# EAGLE board LPC1114FN28_mbed_Board (EAGLE 5.11)
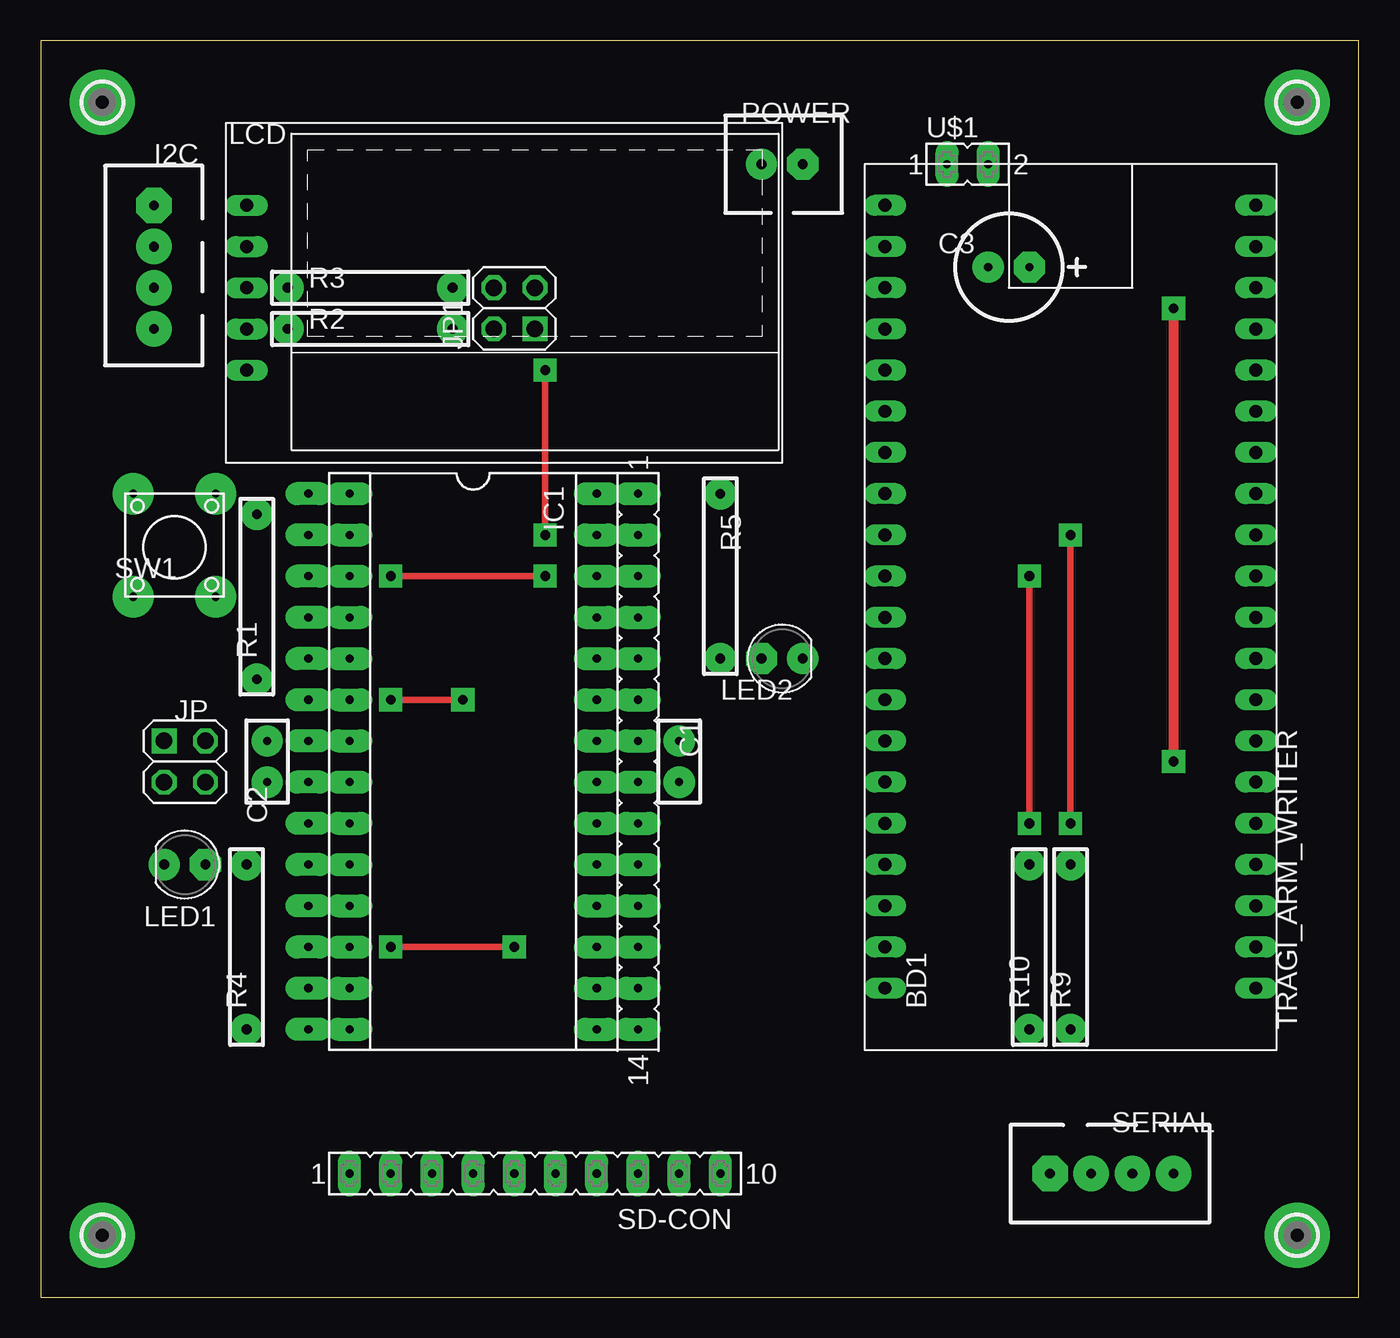
[diagram p0: board, top side]
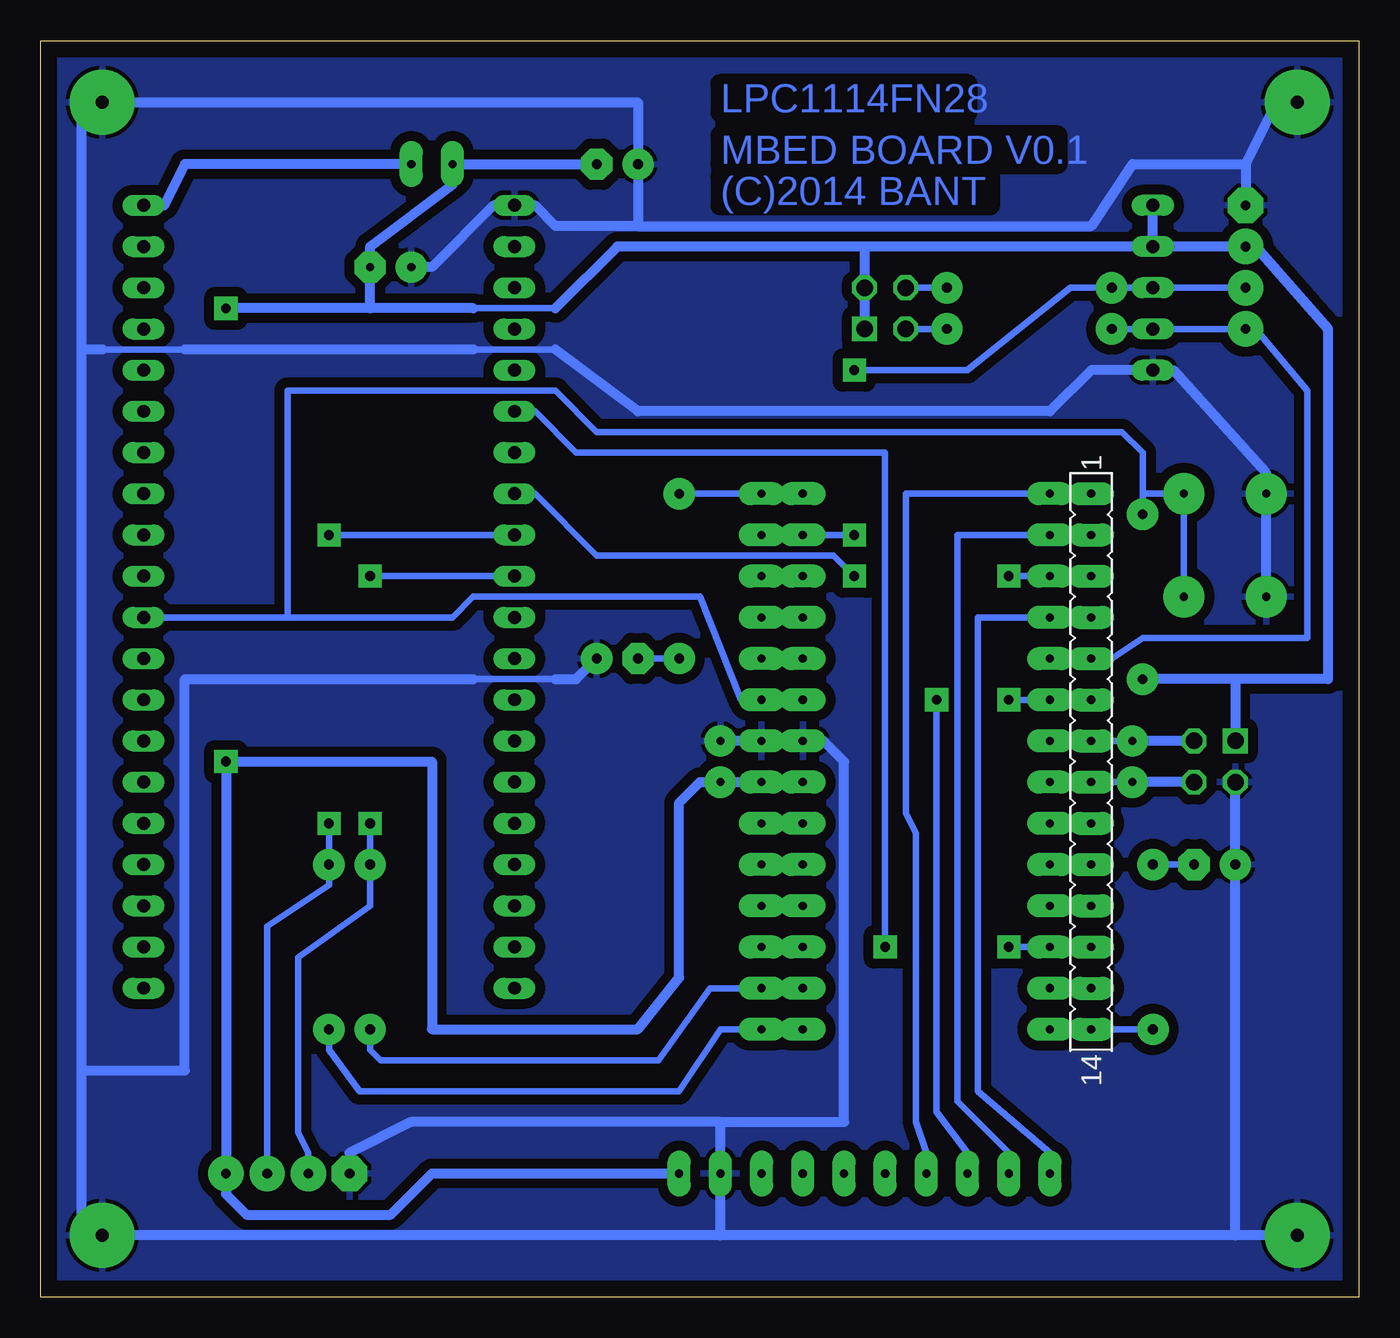
[diagram p1: board, bottom side, seen from below]

Size 81.28 x 77.47 mm. Coordinates in mm from the lower left corner, seen from the top.
Outline: 0,0 81.28,0 81.28,77.47 0,77.47 0,0
Copper layers (1*16): Top 0.035mm / dielectric 1.5mm / Bottom 0.035mm
Design rules "default": minimum track width 10mil, minimum drill 24mil, track to track 8mil, track to pad 8mil, pad to pad 8mil, via to via 8mil, smd to smd 8mil, copper to edge 40mil, drill to drill 8mil, minimum pad ring 10mil, minimum via ring 8mil, stop-mask expansion 4mil, vias tented up to drill 0mil, thermal gap 10mil

## Footprints (pad centres in the part's own frame; a part is rotated, then mirrored left to right if it is on the bottom)
TRAGI_ARM_WRITER = drill 0.8 long: CN1-1 24.13,11.43; CN1-2 21.59,11.43; CN1-3 19.05,11.43; CN1-4 16.51,11.43; CN1-5 13.97,11.43; CN1-6 11.43,11.43; CN1-7 8.89,11.43; CN1-8 6.35,11.43; CN1-9 3.81,11.43; CN1-10 1.27,11.43; CN1-11 -1.27,11.43; CN1-12 -3.81,11.43; CN1-13 -6.35,11.43; CN1-14 -8.89,11.43; CN1-15 -11.43,11.43; CN1-16 -13.97,11.43; CN1-17 -16.51,11.43; CN1-18 -19.05,11.43; CN1-19 -21.59,11.43; CN1-20 -24.13,11.43; CN2-1 24.13,-11.43; CN2-2 21.59,-11.43; CN2-3 19.05,-11.43; CN2-4 16.51,-11.43; CN2-5 13.97,-11.43; CN2-6 11.43,-11.43; CN2-7 8.89,-11.43; CN2-8 6.35,-11.43; CN2-9 3.81,-11.43; CN2-10 1.27,-11.43; CN2-11 -1.27,-11.43; CN2-12 -3.81,-11.43; CN2-13 -6.35,-11.43; CN2-14 -8.89,-11.43; CN2-15 -11.43,-11.43; CN2-16 -13.97,-11.43; CN2-17 -16.51,-11.43; CN2-18 -19.05,-11.43; CN2-19 -21.59,-11.43; CN2-20 -24.13,-11.43
CAP_DIP_1 = drill 0.5 pad 1.93 round: 1 -1.27,0; 2 1.27,0
CCAP_6.5 = drill 0.5 pad 1.93 octagon: + -1.27,0 | drill 0.5 pad 1.93 round: - 1.27,0
CON-S14-1 = drill 0.5 pad 1.422 long: 1 -16.51,0; 2 -13.97,0; 3 -11.43,0; 4 -8.89,0; 5 -6.35,0; 6 -3.81,0; 7 -1.27,0; 8 1.27,0; 9 3.81,0; 10 6.35,0; 11 8.89,0; 12 11.43,0; 13 13.97,0; 14 16.51,0
CON_HRS_DIP_4 = drill 0.6 pad 2.184 octagon: 1 -3.81,0 | drill 0.6 pad 2.184 round: 2 -1.27,0; 3 1.27,0; 4 3.81,0
DIL28 = drill 0.5 pad 1.422 long: 1 -15.24,-7.62; 2 -12.7,-7.62; 3 -10.16,-7.62; 4 -7.62,-7.62; 5 -5.08,-7.62; 6 -2.54,-7.62; 7 0,-7.62; 8 2.54,-7.62; 9 5.08,-7.62; 10 7.62,-7.62; 11 10.16,-7.62; 12 12.7,-7.62; 13 15.24,-7.62; 14 17.78,-7.62; 15 17.78,7.62; 16 15.24,7.62; 17 12.7,7.62; 18 10.16,7.62; 19 7.62,7.62; 20 5.08,7.62; 21 2.54,7.62; 22 0,7.62; 23 -2.54,7.62; 24 -5.08,7.62; 25 -7.62,7.62; 26 -10.16,7.62; 27 -12.7,7.62; 28 -15.24,7.62
2X02 = drill 1.016 square: 1 -1.27,-1.27 | drill 1.016 octagon: 2 -1.27,1.27; 3 1.27,-1.27; 4 1.27,1.27
AE-AQM0802 = drill 0.8 long: 1 -17.78,3.81; 2 -17.78,1.27; 3 -17.78,-1.27; 4 -17.78,-3.81; 5 -17.78,-6.35
LED_3MM_VIRT_2 = drill 0.6 pad 1.93 octagon: A 0,1.27 | drill 0.6 pad 1.93 round: K 0,-1.27
PAD-2.1 = drill 0.8 pad 4 round: B2,1 0,0
CON_HRS_DIP_2 = drill 0.6 pad 1.93 octagon: 1 -1.27,0 | drill 0.6 pad 1.93 round: 2 1.27,0
R_0.125W_4 = drill 0.6 pad 1.93 round: 1 -5.08,0; 2 5.08,0
CON-S10-1 = drill 0.5 pad 1.422 long: 1 1.27,1.27; 2 3.81,1.27; 3 6.35,1.27; 4 8.89,1.27; 5 11.43,1.27; 6 13.97,1.27; 7 16.51,1.27; 8 19.05,1.27; 9 21.59,1.27; 10 24.13,1.27
B3F-10X = drill 0.5 pad 2.54 round: 1 -1.27,2.54; 2 5.08,2.54; 3 -1.27,-2.54; 4 5.08,-2.54
CON-S2-1 = drill 0.5 pad 1.422 long: 1 -1.27,0; 2 1.27,0

## Placement (x,y rotation side)
BD1  TRAGI_ARM_WRITER  [TRAGI_ARM_WRITER]  63.5,43.18 90 top
C1  0.1u  [CAP_DIP_1]  39.37,33.02 270 top
C2  0.1u  [CAP_DIP_1]  13.97,33.02 90 top
C3  47u  [CCAP_6.5]  59.69,63.5 180 top
EXT-CON1  CON-S14-1  [CON-S14-1]  16.51,33.02 270 bottom
EXT-CON2  CON-S14-1  [CON-S14-1]  36.83,33.02 270 top
I2C  [CON_HRS_DIP_4]  6.99,63.5 270 top
IC1  LPC1114FN28  [DIL28]  26.67,34.29 270 top
JP  [2X02]  8.89,33.02 270 top
JP1  [2X02]  29.21,60.96 90 top
LCD  AE-AQM0802  [AE-AQM0802]  30.48,63.5 0 top
LED1  LED  [LED_3MM_VIRT_2]  8.89,26.67 270 top
LED2  LED  [LED_3MM_VIRT_2]  45.72,39.37 90 top
MT1  MOUNT-PAD2.1  [PAD-2.1]  77.47,3.81 180 top
MT2  MOUNT-PAD2.1  [PAD-2.1]  77.47,73.66 0 top
MT3  MOUNT-PAD2.1  [PAD-2.1]  3.81,73.66 0 top
MT4  MOUNT-PAD2.1  [PAD-2.1]  3.81,3.81 0 top
POWER  [CON_HRS_DIP_2]  45.72,69.85 180 top
R1  10K  [R_0.125W_4]  13.34,43.18 90 top
R2  4.7K  [R_0.125W_4]  20.32,59.69 0 top
R3  4.7K  [R_0.125W_4]  20.32,62.23 0 top
R4  1K  [R_0.125W_4]  12.7,21.59 90 top
R5  1K  [R_0.125W_4]  41.91,44.45 270 top
R9  300  [R_0.125W_4]  63.5,21.59 90 top
R10  300  [R_0.125W_4]  60.96,21.59 90 top
SD-CON  CON-S10-1  [CON-S10-1]  17.78,6.35 0 top
SERIAL  [CON_HRS_DIP_4]  66.04,7.62 0 top
SW1  TACT-SW  [B3F-10X]  8.26,44.45 90 top
U$1  CON-S2-1  [CON-S2-1]  57.15,69.85 0 top

## Library data of the parts
BD1 EXT-CON1 EXT-CON2 IC1 SD-CON U$1 = bant
C1-C3 I2C LED1 LED2 MT1-MT4 POWER R1-R5 R9 R10 SERIAL SW1 = MyLib
JP JP1 = pinheader
LCD = akizuki

## Nets
3.3V: C1.2 C3.+ EXT-CON2.8 I2C.2 IC1.21 JP1.1 JP1.3 JP.1 LCD.1 LCD.2 POWER.1 R1.1 SD-CON.10 SERIAL.4 U$1.1
5V: BD1.CN2-2
AGND: C2.1 EXT-CON1.8 IC1.8 JP.4
AVCC: C2.2 EXT-CON1.7 IC1.7 JP.2
DP1(MISO): EXT-CON1.1 IC1.1 SD-CON.4
DP2(MOSI): EXT-CON1.2 IC1.2 SD-CON.2
DP4: EXT-CON1.4 IC1.4 SD-CON.1
DP5(SDA): EXT-CON1.5 I2C.4 IC1.5 LCD.4 R2.1
DP6(SCK): EXT-CON1.6 IC1.6 SD-CON.3
DP9: EXT-CON1.9 IC1.9
DP10: EXT-CON1.10 IC1.10
DP11: EXT-CON1.11 IC1.11
DP13: EXT-CON1.13 IC1.13
DP15: EXT-CON2.14 IC1.15 R9.1
DP15(RX): BD1.CN1-9 R9.2 SERIAL.3
DP16: EXT-CON2.13 IC1.16 R10.1
DP16(TX): BD1.CN1-10 R10.2 SERIAL.2
DP17: EXT-CON2.12 IC1.17
DP18: EXT-CON2.11 IC1.18
DP23(RESET): BD1.CN2-11 EXT-CON2.6 IC1.23 R1.2 SW1.3 SW1.4
DP24(ISP): EXT-CON2.5 IC1.24
DP25: EXT-CON2.4 IC1.25
DP26: EXT-CON2.3 IC1.26
DP27(SCL): EXT-CON2.2 I2C.3 IC1.27 LCD.3 R3.1
EXITPOWER: BD1.CN1-2
GND: BD1.CN1-1 C1.1 C3.- EXT-CON2.7 I2C.1 IC1.22 JP.3 LCD.5 LED1.K LED2.K MT1.B2,1 MT2.B2,1 MT3.B2,1 MT4.B2,1 POWER.2 SD-CON.9 SERIAL.1 SW1.1 SW1.2
LED1: EXT-CON1.14 IC1.14 R4.1
LED2: EXT-CON2.1 IC1.28 R5.1
N$1: JP1.2 R2.2
N$2: JP1.4 R3.2
N$3: LED1.A R4.2
N$4: LED2.A R5.2
N$5: BD1.CN2-1 U$1.2
SWCLK: BD1.CN1-8 EXT-CON1.3 IC1.3
SWDIO: BD1.CN1-6 EXT-CON1.12 IC1.12
USB_VBUS: BD1.CN2-8
XTALIN: EXT-CON2.9 IC1.20
XTALOUT: EXT-CON2.10 IC1.19

## Tracks (layer width: path | path; a pad name or v marks a point on that pad's centre or on a via)
3.3V  (via drill 0.6 pad 1.42)
  Top 0.61: v69.85,60.96 v69.85,33.02
  Bottom 0.406: 6.35,64.77 I2C.2 | R1.1 11.43,38.1 | 49.53,60.96 54.61,60.96
  Bottom 0.61: IC1.21 EXT-CON2.8 C1.2 40.64,31.75 41.91,30.48 41.91,19.68 44.45,16.51 57.15,16.51 57.15,33.02 v69.85,33.02 SERIAL.4 69.85,6.35 68.58,5.08 59.69,5.08 57.15,7.62 SD-CON.10 | LCD.2 LCD.1 | I2C.2 LCD.2 | JP1.1 JP1.3 30.48,64.77 | 6.35,64.77 1.91,59.69 1.91,38.1 7.62,38.1 | 54.61,60.96 60.96,60.96 | 60.96,60.96 v69.85,60.96 | 7.62,38.1 R1.1 | 7.62,38.1 JP.1 | LCD.2 30.48,64.77 | 30.48,64.77 45.72,64.77 49.53,60.96 | POWER.1 U$1.1 55.88,68.58 60.96,64.77 C3.+ 60.96,60.96
AGND
  Bottom 0.406: C2.1 EXT-CON1.8 IC1.8
  Bottom 0.61: JP.4 C2.1
AVCC
  Bottom 0.406: C2.2 EXT-CON1.7 IC1.7
  Bottom 0.61: JP.2 C2.2
DP1(MISO)
  Bottom 0.406: EXT-CON1.1 IC1.1 27.94,49.53 27.94,29.84 27.3,28.57 27.3,10.79 26.67,8.89 SD-CON.4
DP2(MOSI)
  Bottom 0.406: EXT-CON1.2 IC1.2 24.77,46.99 24.77,12.06 21.59,8.89 SD-CON.2
DP4
  Bottom 0.406: EXT-CON1.4 IC1.4 23.5,41.91 23.5,12.7 19.05,8.89 SD-CON.1
DP5(SDA)
  Bottom 0.254: 15.24,39.37 EXT-CON1.5
  Bottom 0.406: R2.1 LCD.4 I2C.4 6.35,59.69 3.17,55.88 3.17,40.64 13.34,40.64 15.24,39.37 | EXT-CON1.5 IC1.5
DP6(SCK)  (via drill 0.6 pad 1.42)
  Top 0.406: v26.04,36.83 v21.59,36.83
  Bottom 0.406: EXT-CON1.6 IC1.6 v21.59,36.83 | SD-CON.3 24.13,8.89 26.04,11.43 v26.04,36.83
DP9
  Bottom 0.406: EXT-CON1.9 IC1.9
DP10
  Bottom 0.406: EXT-CON1.10 IC1.10
DP11
  Bottom 0.406: EXT-CON1.11 IC1.11
DP13
  Bottom 0.406: EXT-CON1.13 IC1.13
DP15
  Bottom 0.406: IC1.15 EXT-CON2.14 39.37,16.51 41.91,12.7 61.59,12.7 63.5,15.24 R9.1
DP15(RX)  (via drill 0.6 pad 1.42)
  Top 0.406: v63.5,29.21 v63.5,46.99
  Bottom 0.406: SERIAL.3 67.31,22.86 63.5,25.4 R9.2 v63.5,29.21 | v63.5,46.99 BD1.CN1-9
DP16
  Bottom 0.406: IC1.16 EXT-CON2.13 40.01,19.05 43.18,14.61 60.33,14.61 60.96,15.24 R10.1
DP16(TX)  (via drill 0.6 pad 1.42)
  Top 0.406: v60.96,29.21 v60.96,44.45
  Bottom 0.406: SERIAL.2 64.77,8.89 65.41,10.16 65.41,20.95 60.96,24.13 R10.2 v60.96,29.21 | v60.96,44.45 BD1.CN1-10
DP17
  Bottom 0.406: IC1.17 EXT-CON2.12
DP18
  Bottom 0.406: IC1.18 EXT-CON2.11
DP23(RESET)
  Bottom 0.406: SW1.3 SW1.4 13.34,49.53 | IC1.23 EXT-CON2.6 38.1,36.83 40.64,43.18 54.61,43.18 55.88,41.91 66.04,41.91 | 66.04,41.91 66.04,55.88 49.53,55.88 46.99,53.34 14.61,53.34 13.34,52.07 13.34,49.53 | 66.04,41.91 BD1.CN2-11 | 13.34,49.53 R1.2
DP24(ISP)
  Bottom 0.406: IC1.24 EXT-CON2.5
DP25
  Bottom 0.406: IC1.25 EXT-CON2.4
DP26
  Bottom 0.406: IC1.26 EXT-CON2.3
DP27(SCL)  (via drill 0.6 pad 1.42)
  Top 0.406: v31.11,57.15 v31.11,46.99
  Bottom 0.406: I2C.3 LCD.3 R3.1 17.78,62.23 24.13,57.15 v31.11,57.15 | EXT-CON2.2 IC1.27 v31.11,46.99
GND
  Bottom 0.254: 33.02,34.29 IC1.22
  Bottom 0.406: 5.08,73.66 MT3.B2,1 | 54.61,38.1 49.53,38.1 | 72.39,58.42 77.47,58.42 | 49.53,58.42 54.61,58.42 | 11.43,57.15 LCD.5
  Bottom 0.61: IC1.22 EXT-CON2.7 C1.1 | JP.3 LED1.K 7.62,3.81 | 39.37,10.79 SD-CON.9 39.37,3.81 | 39.37,10.79 58.42,10.79 62.23,8.89 SERIAL.1 | 33.02,34.29 31.75,33.02 31.75,10.79 39.37,10.79 | MT4.B2,1 7.62,3.81 | 7.62,3.81 39.37,3.81 | 39.37,3.81 MT1.B2,1 78.74,3.81 78.74,13.97 | 78.74,13.97 78.74,73.66 MT2.B2,1 44.45,73.66 POWER.2 44.45,66.04 | 78.74,13.97 72.39,13.97 72.39,38.1 54.61,38.1 | 49.53,38.1 48.26,38.1 LED2.K | 6.99,69.85 I2C.1 | LCD.5 16.51,57.15 19.05,54.61 44.45,54.61 49.53,58.42 | 77.47,58.42 78.74,58.42 | 54.61,58.42 72.39,58.42 | 11.43,57.15 5.71,50.8 SW1.2 SW1.1 | 6.99,69.85 5.08,73.66 | 44.45,66.04 49.53,66.04 50.8,67.31 BD1.CN1-1 53.34,67.31 57.15,63.5 C3.- | 44.45,66.04 16.51,66.04 13.97,69.85 6.99,69.85
  pour Bottom (isolate 0.61): 0,77.47 0,0 81.28,0 81.28,77.47
LED1
  Bottom 0.406: IC1.14 EXT-CON1.14 R4.1
LED2
  Bottom 0.406: IC1.28 EXT-CON2.1 R5.1
N$1
  Bottom 0.406: R2.2 JP1.2
N$2
  Bottom 0.406: R3.2 JP1.4
N$3
  Bottom 0.406: LED1.A R4.2
N$4
  Bottom 0.406: R5.2 LED2.A
N$5
  Bottom 0.61: BD1.CN2-1 73.66,67.31 72.39,69.85 U$1.2
SWCLK  (via drill 0.6 pad 1.42)
  Top 0.406: v21.59,44.45 v31.11,44.45
  Bottom 0.406: BD1.CN1-8 50.8,49.53 46.99,45.72 32.38,45.72 v31.11,44.45 | EXT-CON1.3 IC1.3 v21.59,44.45
SWDIO  (via drill 0.6 pad 1.42)
  Top 0.406: v21.59,21.59 v29.21,21.59
  Bottom 0.406: EXT-CON1.12 IC1.12 v21.59,21.59 | BD1.CN1-6 50.8,54.61 48.26,52.07 29.21,52.07 v29.21,21.59
XTALIN
  Bottom 0.406: IC1.20 EXT-CON2.9
XTALOUT
  Bottom 0.406: IC1.19 EXT-CON2.10

## Text on the board
Bottom: LPC1114FN28 | MBED BOARD V0.1 | (C)2014 BANT